# Altium PCB PCB.PcbDoc
Units mil, origin at the board's own origin, x right, y up, seen from the top; angles counter-clockwise.
Board outline 2691.25 x 1270.94 mil, 2 copper layers (Top Layer, Bottom Layer), stack 62.205 mil thick; 18 components, 8 nets, 40 pads, 4 vias.
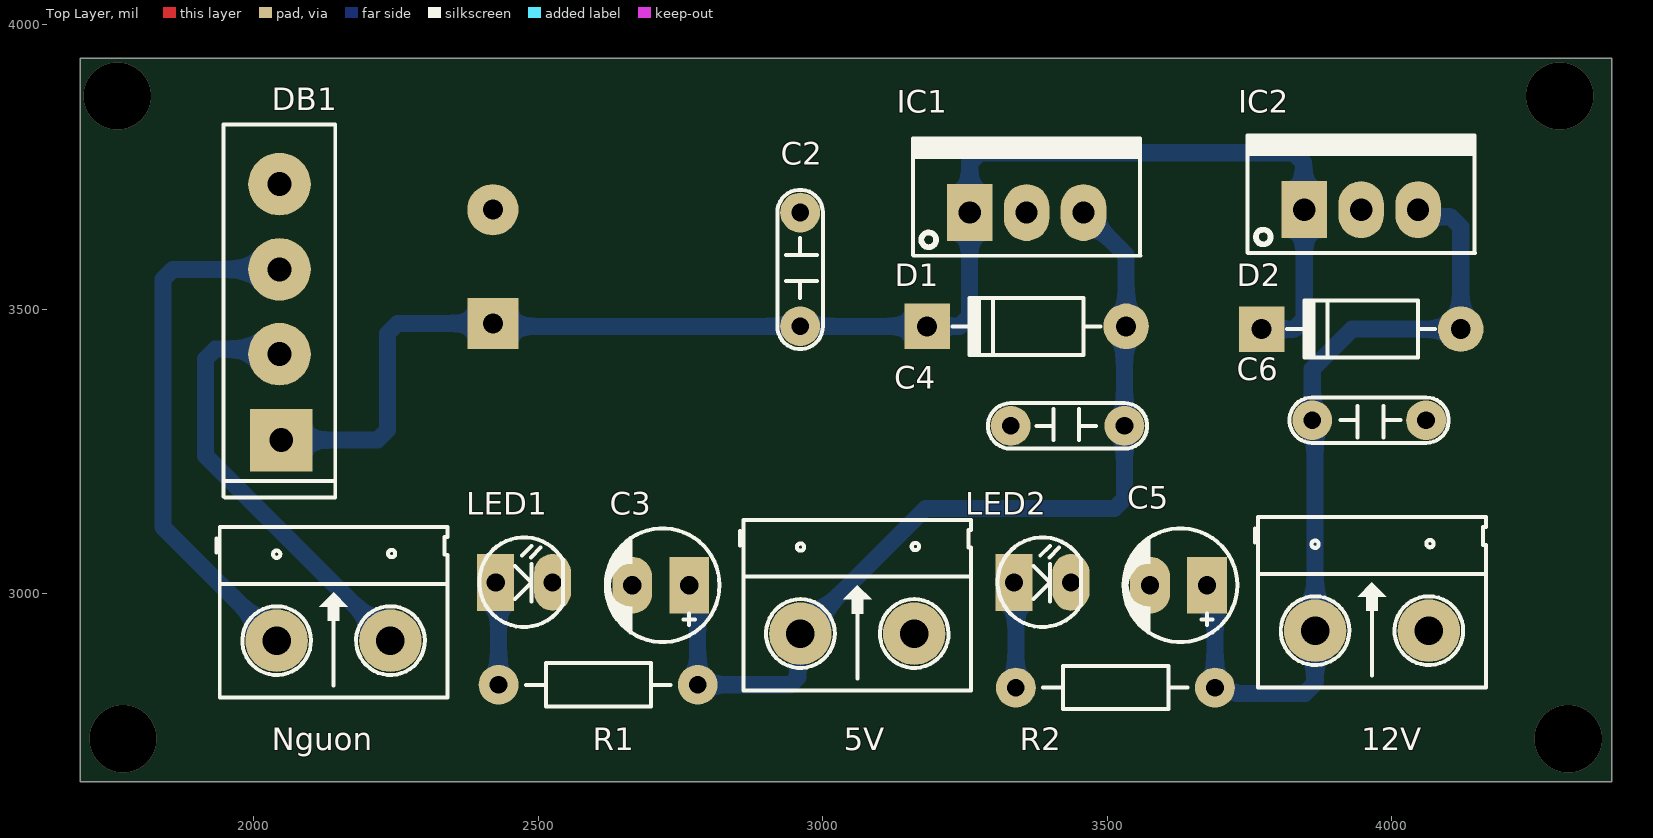
[diagram p0: Top Layer view]
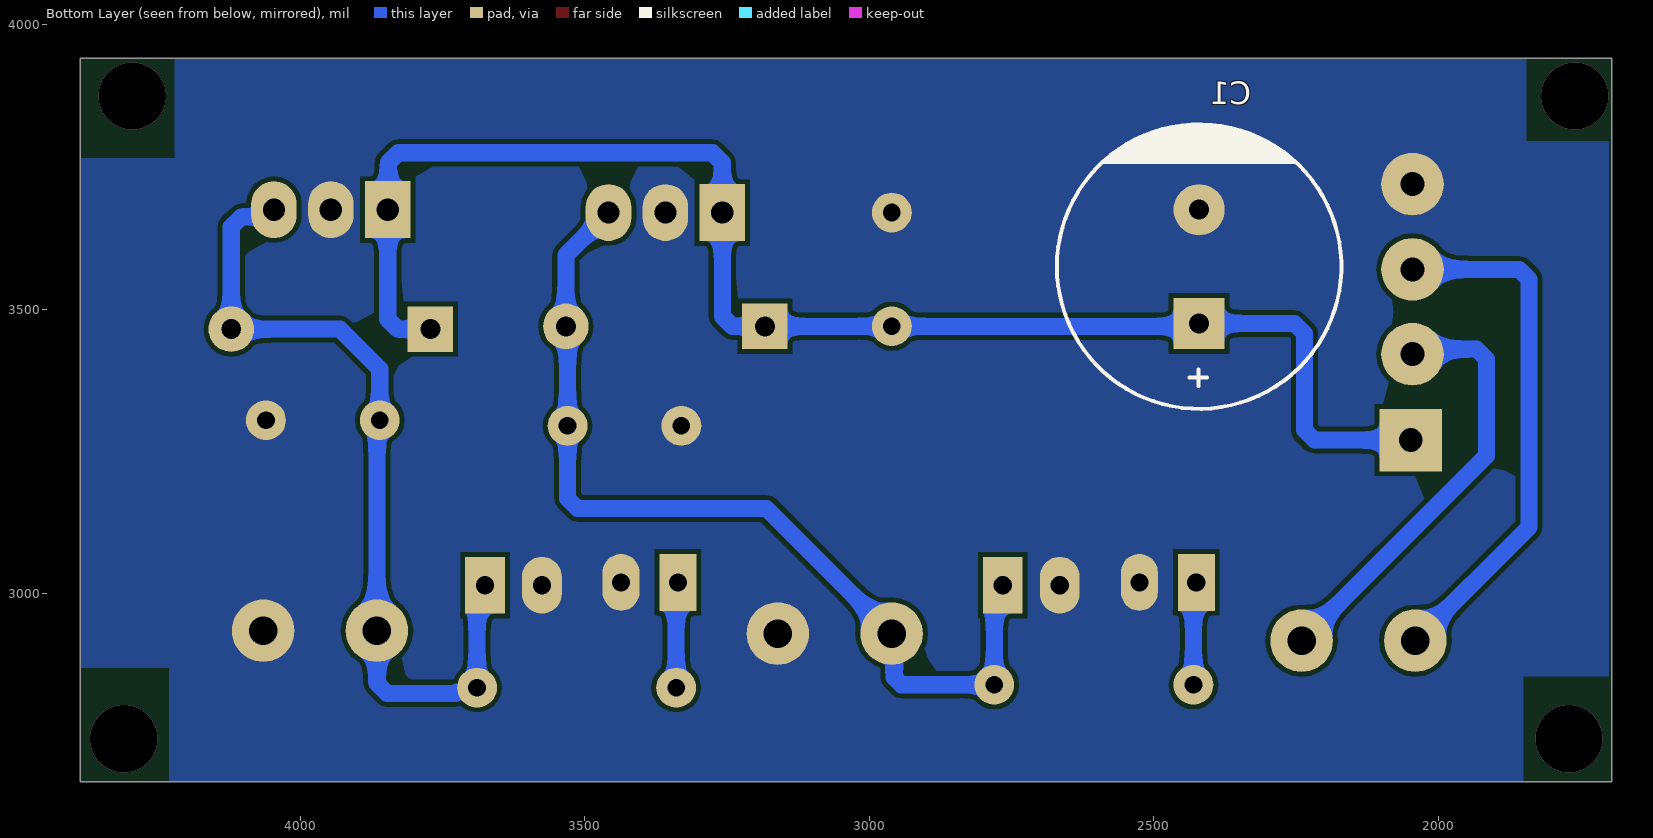
[diagram p1: Bottom Layer view, seen from below]
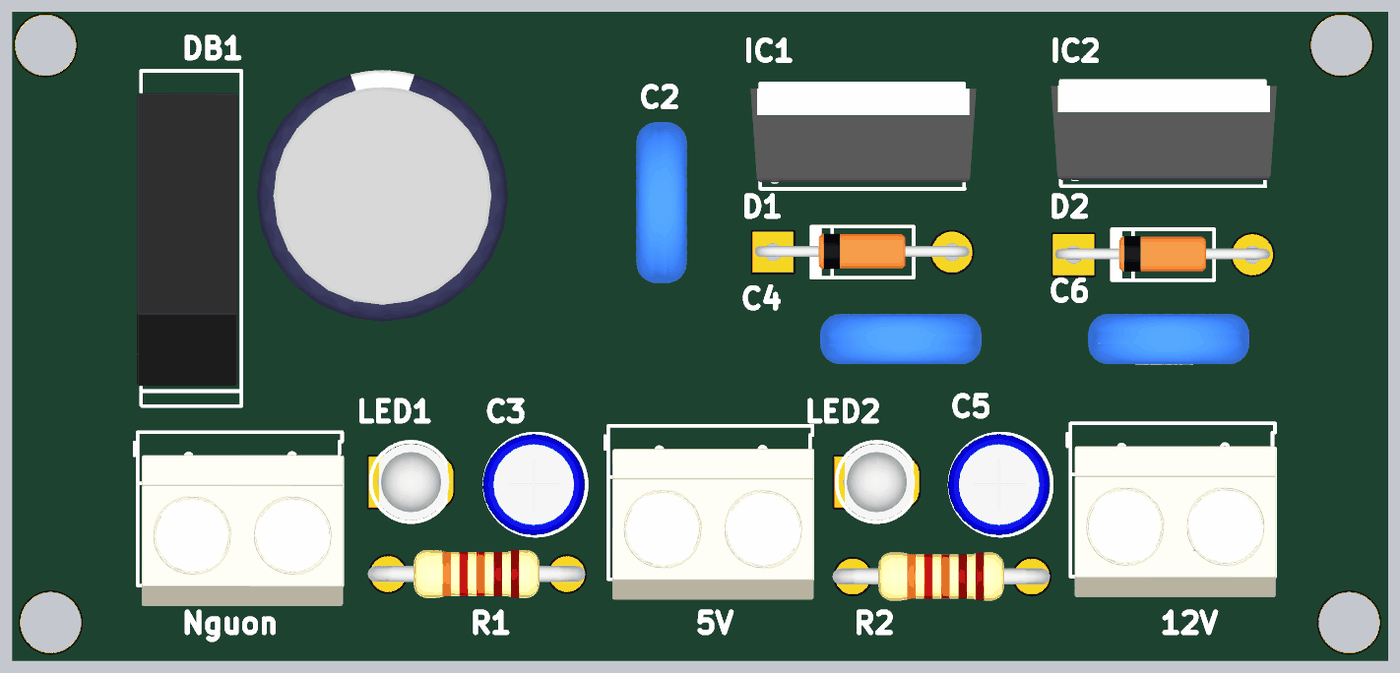
[diagram p2: 3D render of the assembled board from above, using the file's embedded part models]

## Layer stack, top to bottom
Top Solder: solder mask 0.3937, Solder Resist, Dk 3.5
Top Layer: signal copper 1.378
Dielectric 1: dielectric 59.4488, FR-4, Dk 4.8
Bottom Layer: signal copper 1.378
Bottom Solder: solder mask 0.3937, Solder Resist, Dk 3.5

## Board outline
1695,2670 1695,3940.94 4386.25,3940.94 4386.25,2670

## Design rules (kind name [scope] priority, off if disabled: settings)
Clearance [All] p1: gap=8 ignorepadtopadclearanceinfootprint=FALSE
PlaneConnect [All] p1: planeconnectstyle=Direct reliefexpansion=20 reliefentries=4 reliefconductorwidth=10 reliefairgap=10
PolygonConnect [All] p1: connectstyle=Direct reliefconductorwidth=10 reliefentries=4 polygonreliefangle="90 Angle" airgapwidth=10
RoutingVias [All] p1: holewidth=28 width=50 viastyle="Through Hole" minholewidth=28 minwidth=50 maxholewidth=28 maxwidth=50
SolderMaskExpansion [All] p1: expansion=4 istentingtop=FALSE
Width [All] p1: maxlimit=30 minlimit=6 preferedwidth=20
29 further rules are at their usual default settings.

## Classes and differential pairs
component class Shematic: 5V 12V C1 C2 C3 C4 C5 C6 D1 D2 DB1 IC1 IC2 LED1 LED2 Nguon

## Components (designator, comment, footprint, x,y, rotation, side; value= is the part's Value field where it differs from the comment)
5V "Header 2" HED2 2960.5,2930 r0 top
12V "Header 2" HED2 3865,2935 r0 top
C1 "Cap Pol3" CP2/5 2420,3475 r90 bottom value=C?
C2 "104" CN2 2960,3670 r270 top value=0.1uF
C3 "10uF" CP1/2 2765,3015 r180 top value=10uF/50V
C4 "104" CN2 3330,3295 r0 top value=0.1uF
C5 "10uF" CP1/2 3675,3015 r180 top value=10uF/50V
C6 "104" CN2 4060,3305 r180 top value=0.1uF
D1 "1N4007" D1A 3533.03,3470 r0 top
D2 "1N4007" D1A 4121.04,3465 r0 top
DB1 "Diode Brideg" "CAU 1A" 2046,3270 r90 top value="Cau 1A"
IC1 "LM7805" QTO-220 3258.02,3670 r0 top
IC2 "LM7812" QTO-220 3846.04,3675 r0 top value=LM7805
LED1 "LED" LED-3 2425,3020 r0 top value="LED 3 ly Single Colour"
LED2 "LED" LED-3 3336.02,3020 r0 top value="LED 3 ly Single Colour"
Nguon "Header 2" HED2 2040,2917.51 r0 top
R1 "Res1" R1/4W 2430,2840 r0 top value=330
R2 "Res1" R1/4W 3339.11,2835 r0 top value=1K

## Footprints (in the part's own frame and the unit in brackets; to place one, negate y for a bottom-side part, rotate by r counter-clockwise, add the part's x,y. Pads: shape width x height; smd on the part's side, far side on the other; paste and mask are expansions set on the pad)
"CAU 1A" [mil] "CAU 1A DET"
  rect 110x110 hole 42: 1(0,-2)
  round 110 hole 42: 2(151,1) 3(300,1) 4(450,1)
  silkscreen extent -101,-97 555,99, body extent -62,-90 512,107, height 453
CN2 [mil]
  round 70 hole 31: 1(0,0) 2(200,0)
  silkscreen extent -40,-40 240,40, body extent -54,-44 260,55, height 407
CP1/2 [mil] "Tu hoa < 22uF/16>50V"
  rect 70x100 hole 32: 1(0,0)
  oval 70x100 hole 32: 2(100,0)
  silkscreen extent -53,-100 147,100, body extent -49,-99 149,99, height 287
CP2/5 [mil] "Tu hoa 1000uF/25V,50V"
  rect 90x90 hole 35: 1(0,0)
  round 90 hole 35: 2(200,0)
  silkscreen extent -150,-250 350,250, body extent -141,-247 351,245, height 984
D1A [mil] "Diode 1A, W 100mil, L 350mil"
  round 80 hole 35: 1(0,0)
  rect 80x80 hole 35: 2(-350,0)
  silkscreen extent -305,-50 -45,50, body extent -386,-33 34,36, height 84
HED2 [mil] "Header 2, 2 pin, hight 300mil, Pin to Pin 200, Colour Green"
  round 110 hole 50: 1(0,0) 2(200,0)
  silkscreen extent -106,-100 300,200, body extent -92,-140 302,155, height 394
LED-3 [mil] "LED 2 PIN, 3ly Only colour"
  rect 65x100 hole 32: 1(0,0)
  oval 65x100 hole 32: 2(100,0)
  silkscreen extent -29,-78 118,79, body extent -13,-75 125,75, height 217
QTO-220 [mil] "TO-220 - 1-2-3"
  rect 80x100 hole 39: 1(0,0)
  oval 80x100 hole 39: 2(100,0) 3(200,0)
  silkscreen extent -100,-76 300,130, body extent -119,-64 322,121, height 755
R1/4W [mil] "R 1/4W, 2 Pin, 350mil"
  round 70 hole 31: 1(0,0) 2(350,0)
  silkscreen extent 48,-38 302,38, body extent -40,-47 386,47, height 111

## Part data
5V 12V Nguon: library part Hed2, "Header 2 (Green)"
C1: library part "Cap Pol3_2", "Polarized Capacitor (Surface Mount)", LatestRevisionDate=17-Jul-2002, LatestRevisionNote="Re-released for DXP Platform.", PackageReference=C0805, Publisher="Altium Limited"
C2 C4 C6: library part CN2, "Cap np 104 => 105pF"
C3 C5: library part CP1, "Cap P  0,1uF < 22uF , 16 - 50V", Description 1="10 => 220uF/6,3V/10V - 10uF => 100uF/16V", Description 2="0,1uF => 33uF/50V - 10uF => 22uF/63V", Description 3="0,47uF => 10uF/100V"
D1 D2: library part D1A, "Diode 1A"
DB1: library part DB, "Convert AC to DC voltage, 4 pin"
IC1 IC2: library part LM78xx, "On ap +, from + 5 to + 24VDC"
LED1 LED2: "LED Single colour Green and Red"
R1 R2: library part Res1_1, "Resistor", Manufacturer="Generic Components", Class=Passive, Published=08/06/2000, Publisher="Altium Hobart Technology Centre", SubClass=Resistor

## Via types
v1: diameter 118.11, hole 118.11, Top Layer to Bottom Layer, 4 vias

## Nets (pads, with @x,y where several pads share a name; then routed paths per layer and width w, separated by ;. In a path a pad name is that pad's centre, name@x,y a point inside that pad or via, vN(x,y) a via of type N, cw(c..) or ccw(c..) an arc to the next point about the centre after c; other vN are vias at no path point)
GND: 5V.2 12V.2 C1.2 C2.1 C3.2 C4.1 C5.2 C6.1 DB1.4 IC1.2 IC2.2 LED1.2 LED2.2
Net5V_1: 5V.1 C3.1 C4.2 D1.1 IC1.3 R1.2 | length 1644.1
  Bottom Layer w30: C3.1 2780,3000 R1.2 2942.93,2840 2956.01,2853.08 2956.01,2925.5 5V.1 3180.5,3150 3512.43,3150 3530,3167.57 C4.2 3530,3466.97 D1.1 3533.03,3595 IC1.3
Net12V_1: 12V.1 C5.1 C6.2 D2.1 IC2.3 R2.2 | length 1484.9
  Bottom Layer w30: C5.1 3689.11,3000.89 R2.2 3696.77,2827.35 3724.34,2827.35 3726.69,2825 3847.43,2825 3865,2842.57 12V.1 3865,3300 C6.2 3860,3395 3930,3465 D2.1 4121.04,3644.65 4103.47,3662.22 4058.81,3662.22 IC2.3
NetC1_1: C1.1 C2.2 D1.2 D2.2 DB1.1 IC1.1 IC2.1 | length 2642.7
  Bottom Layer w30: DB1.1 2217.43,3270 2235,3287.57 2235,3457.43 2252.57,3475 C1.1 2425,3470 C2.2 D1.2 3240.45,3470 3258.02,3487.57 IC1.1@3258.02,3680 ; IC1.1 3258.02,3757.43 3275.59,3775 3827.43,3775 3845,3757.43 3845,3676.04 IC2.1 3846.04,3482.57 3828.46,3465 D2.2
NetDB1_2: DB1.2 Nguon.2 | length 770.5
  Bottom Layer w30: DB1.2 2036,3430 1932.57,3430 1915,3412.43 1915,3242.51 Nguon.2
NetDB1_3: DB1.3 Nguon.1 | length 930
  Bottom Layer w30: Nguon.1 1840,3117.51 1840,3552.43 1857.57,3570 DB1.3
NetLED1_1: LED1.1 R1.1 | length 182.1
  Bottom Layer w30: LED1.1 2430,3015 R1.1
NetLED2_1: LED2.1 R2.1 | length 186.3
  Bottom Layer w30: LED2.1 3339.11,3016.9 R2.1
copper on no net:
  other v1: 1770,2745 4310,2745 1760,3875 4295,3875

## Polygon pours and split planes (outlines as drawn)
GND on Bottom Layer "GND_L02_P001" (solid, remove dead copper, pour order 1): 1845,3795 1700,3795 1700,2855 1850,2855 1850,2670 4230,2670 4230,2870 4385,2870 4385,3765 4220,3765 4220,3940 1845,3940
no net on Bottom Layer "NONET_L02_P000" (solid, pour order 0): 1840,3745